# Altium PCB POEInjector.PcbDoc (part 2 of 2)
Units mil, origin at the board's own origin, x right, y up, seen from the top; angles counter-clockwise.
Board outline 5250 x 1900 mil, 4 copper layers (Top Layer, GND Plane, 24V Plane, Bottom Layer), stack 30.634 mil thick; 65 components, 70 nets, 262 pads, 25 vias.
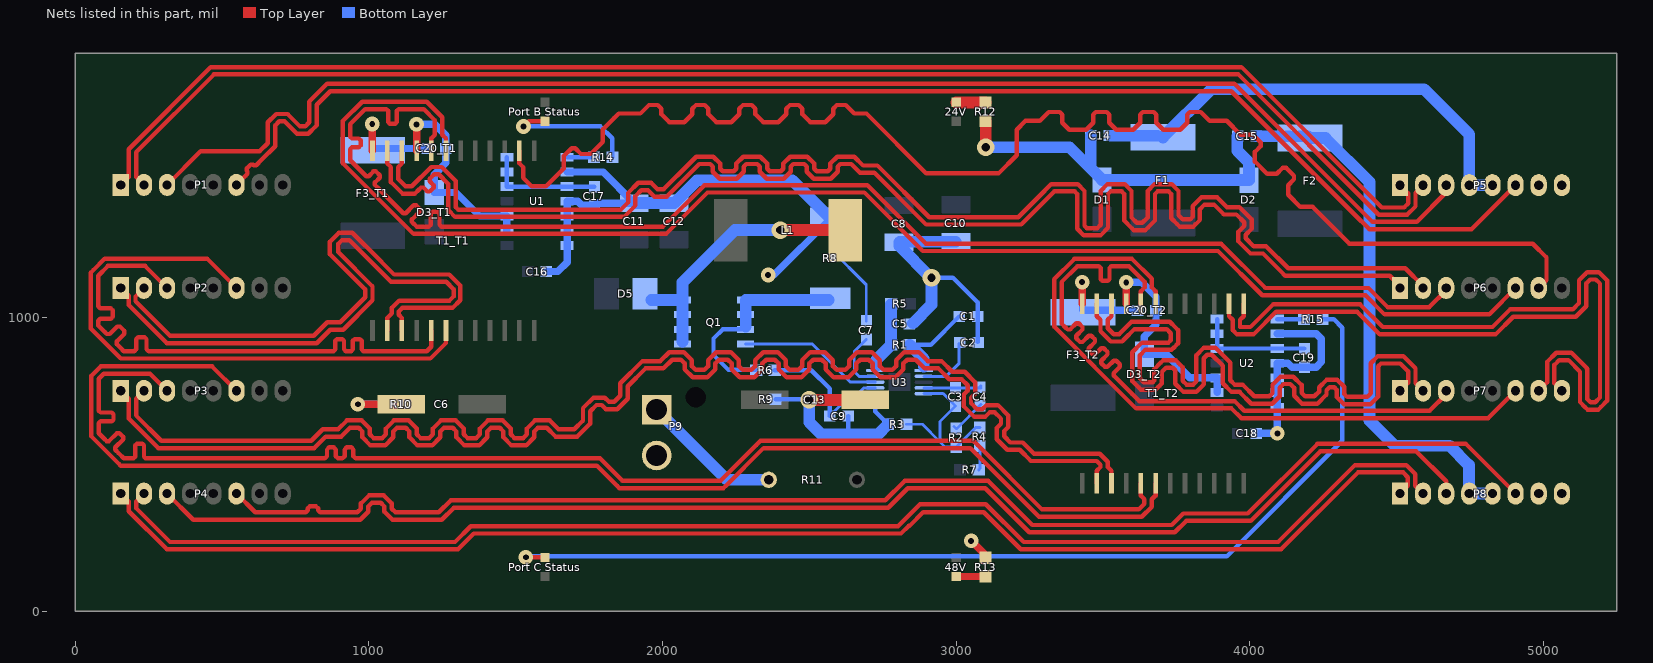
[diagram p4: the nets of this part, all layers, seen from the top]

## Via types
v1: diameter 50, hole 20, Top Layer to Bottom Layer, 14 vias
v2: diameter 60, hole 28, Top Layer to Bottom Layer, 7 vias
v3: diameter 200, hole 125, Top Layer to Bottom Layer, 4 vias

## Nets (pads, with @x,y where several pads share a name; then routed paths per layer and width w, separated by ;. In a path a pad name is that pad's centre, name@x,y a point inside that pad or via, vN(x,y) a via of type N, cw(c..) or ccw(c..) an arc to the next point about the centre after c; other vN are vias at no path point) (continued)
BR_OUT_T1_P: P6.7 T1_T1.14 | length 5009.2
  Top Layer w15: T1_T1.14@1513,1566.71 1513,1524.17 1525.5,1511.67 1525.5,1475.14 1547.32,1453.32 1554.64,1446 1603.36,1446 1610.68,1453.32 1664.22,1506.87 1664.22,1549.29 1690.84,1575.91 1703.11,1575.91 1722.91,1556.11 1755.9,1556.11 1797.16,1597.38 1797.16,1639.8 1834.68,1677.32 1851.36,1694 1925.18,1694 1954.18,1723 1983.82,1723 1996.5,1710.32 1996.5,1691.32 2023.82,1664 2074.18,1664 2101.5,1691.32 2101.5,1710.32 2114.18,1723 2143.82,1723 2156.5,1710.32 2156.5,1691.32 2183.82,1664 2234.18,1664 2261.5,1691.32 2261.5,1710.32 2274.18,1723 2303.82,1723 2316.5,1710.32 2316.5,1691.32 2343.82,1664 2394.18,1664 2421.5,1691.32 2421.5,1710.32 2434.18,1723 2463.82,1723 2476.5,1710.32 2476.5,1691.32 2503.82,1664 2554.18,1664 2581.5,1691.32 2581.5,1710.32 2594.18,1723 2623.82,1723 2652.82,1694 2694.64,1694 2898.64,1490 3144.36,1490 3206,1551.64 3206,1639 3236,1669 3285.18,1669 3315.18,1699 3352.82,1699 3361.5,1690.32 3361.5,1662.32 3384.82,1639 3443.18,1639 3466.5,1662.32 3466.5,1690.32 3475.18,1699 3512.82,1699 3521.5,1690.32 3521.5,1662.32 3544.82,1639 3603.18,1639 3626.5,1662.32 3626.5,1690.32 3635.18,1699 3672.82,1699 3681.5,1690.32 3681.5,1662.32 3704.82,1639 3763.18,1639 3786.5,1662.32 3786.5,1690.32 3795.18,1699 3832.82,1699 3862.82,1669 3921,1669 3968.05,1621.95 4010.47,1621.95 4037.09,1595.34 4037.09,1583.06 4017.29,1563.26 4017.29,1530.28 4058.56,1489.02 4091.54,1489.02 4111.34,1508.82 4123.61,1508.82 4150.23,1482.2 4150.23,1469.93 4130.43,1450.13 4130.43,1417.14 4171.69,1375.88 4214.12,1375.88 4339,1251 4963,1251 5010,1204 5010,1126.56 P6.7@4983.44,1100
BR_OUT_T2_N: P7.8 T1_T2.13 | length 2370.8
  Top Layer w15: T1_T2.13@3979,1046.71 3979,1004.17 3966.5,991.67 3966.5,967 4002,967 4079,1044 4375.36,1044 4452.36,967 4826,967 4886,1027 5099,1027 5120.5,1048.5 5120.5,1125.86 5141.32,1146.68 5148.64,1154 5188.36,1154 5195.68,1146.68 5217,1125.36 5217,716.64 5193.68,693.32 5186.36,686 5149.64,686 5142.32,693.32 5124,711.64 5124,815 5084.5,854.5 5053.5,854.5 5037,838 5037,775.18 P7.8@5062.18,750
BR_OUT_T2_P: P7.7 T1_T2.14 | length 2372.2
  Top Layer w15: T1_T2.14@3929,1046.71 3929,1004.17 3941.5,991.67 3941.5,956.64 3956.14,942 4012.36,942 4089.36,1019 4365,1019 4442,942 4836.36,942 4896.36,1002 5109.36,1002 5145.5,1038.14 5145.5,1115.5 5159,1129 5178,1129 5192,1115 5192,727 5176,711 5160,711 5149,722 5149,825.36 5140,834.36 5094.86,879.5 5043.14,879.5 5012,848.36 5012,778.56 P7.7@4983.44,750
G1_N: P1.6 P5.6 | length 4877.6
  Top Layer w15: P1.6@549.7,1451 580.85,1482.15 587.21,1488.51 587.21,1497 585.2,1499.02 585.2,1507.5 597.92,1520.23 606.41,1520.23 608.43,1518.21 616.91,1518.21 634.35,1535.65 681.48,1582.78 681.48,1605 681.48,1653.49 695.37,1667.38 713.3,1667.38 755.73,1624.96 794.37,1624.96 820.53,1651.12 822.9,1653.49 822.9,1724.2 868.7,1770 3937,1770 4354,1353 4407,1300 4754.7,1300 P5.6@4904.7,1450
G1_P: P1.3 P5.3 | length 4876.3
  Top Layer w15: P1.3@313.48,1451 428.48,1566 629.35,1566 656.48,1593.14 656.48,1611.06 656.48,1663.85 685.02,1692.38 723.66,1692.38 766.08,1649.96 784.01,1649.96 797.9,1663.85 797.9,1734.56 858.35,1795 3947.36,1795 4417.36,1325 4568,1325 4668.48,1425.48 P5.3@4668.48,1450
G2_N: P4.6 P8.6 | length 4765.3
  Top Layer w15: P4.6@549.7,400 613.7,336 775,336 785.5,336 792.5,343 792.5,349.36 799.5,356.36 820.5,356.36 827.5,349.36 827.5,343 834.5,336 853,336 960.82,336 973.5,348.68 973.5,366.46 1000.82,393.78 1051.18,393.78 1078.5,366.46 1078.5,348.68 1091.18,336 1238.64,336 1279.82,377.18 2758.82,377.18 2824.64,443 3109.36,443 3259.36,293 3734,293 3773,332 3993,332 4230,569 4735.7,569 P8.6@4904.7,400
G2_P: P4.3 P8.3 | length 4765.3
  Top Layer w15: P4.3@313.48,400 402.48,311 834.5,311 853,311 971.18,311 998.5,338.32 998.5,356.1 1011.18,368.78 1040.82,368.78 1053.5,356.1 1053.5,338.32 1080.82,311 1249,311 1290.18,352.18 2769.18,352.18 2835,418 3099,418 3249,268 3744.36,268 3783.36,307 4003.36,307 4240.36,544 4566,544 4668.48,441.52 P8.3@4668.48,400
G_IN_T1_N: P2.6 T1_T1.6 | length 2062.9
  Top Layer w15: P2.6@549.7,1100 449.7,1200 101.64,1200 61.32,1159.68 54,1152.36 54,962 156,860 1210,860 1262.75,912.75 1263,912.75 T1_T1.6@1263,955.29
G_IN_T1_P: P2.3 T1_T1.5 | length 2063.1
  Top Layer w15: P2.3@313.48,1100 238.48,1175 112,1175 79,1142 79,1048 79,1037.5 86,1030.5 122,1030.5 129,1023.5 129,1002.5 122,995.5 86,995.5 79,988.5 79,972.36 79.18,972.18 100.68,950.68 108.1,943.25 118,943.25 143.46,968.71 153.36,968.71 168.21,953.86 168.21,943.96 142.75,918.5 142.75,908.6 155.68,895.68 166.36,885 191,885 201.5,885 208.5,892 208.5,925.9 215.5,932.9 236.5,932.9 243.5,925.9 243.5,892 250.5,885 265,885 871,885 880,885 886,891 886,920.01 892,926.01 910,926.01 916,920.01 916,891 922,885 940,885 946,891 946,920.01 952,926.01 970,926.01 976,920.01 976,891 982,885 984,885 1198,885 1213,900 T1_T1.5@1213,955.29
G_IN_T2_N: P3.6 T1_T2.6 | length 4684.9
  Top Layer w15: P3.6@549.7,750 466.7,833 87.64,833 56,801.36 56,594.64 148.32,502.32 155.64,495 1777,495 1846,426 1853.32,418.68 2208.03,418.68 2215.36,426 2344.36,555 3048,555 3271,332 3282,321 3632.36,321 3666,354.64 3666,381 3677.75,392.75 3679,392.75 T1_T2.6@3679,435.29
G_IN_T2_P: P3.3 T1_T2.5 | length 4685.7
  Top Layer w15: P3.3@313.48,750 255.48,808 98,808 81,791 81,691 81,682 87,676 125,676 131,670 131,652 125,646 87,646 81,640 81,616 81,605 82.5,603.5 101,585 107.36,578.64 115.85,578.64 142.72,605.51 151.2,605.51 163.93,592.78 163.93,584.29 137.06,557.42 137.06,548.94 149.5,536.5 166,520 190,520 199,520 205,526 205,564 211,570 229,570 235,564 235,525 240,520 843,520 850.5,520 858,527.5 858,549.84 865.5,557.34 880.5,557.34 888,549.84 888,527.5 895.5,520 910.5,520 918,527.5 918,549.84 925.5,557.34 940.5,557.34 948,549.84 948,527.5 955.5,520 985,520 1787.36,520 1863.68,443.68 2197.68,443.68 2319,565 2334,580 3058.36,580 3073.36,565 3292.36,346 3622,346 3641,365 3641,381 3629.25,392.75 3629,392.75 T1_T2.5@3629,435.29
G_OUT_T1_N: P6.6 T1_T1.19 | length 5010.7
  Top Layer w15: T1_T1.19@1263,1566.71 1263,1609.25 1250.5,1621.75 1250.5,1680.86 1197.36,1734 977.64,1734 912,1668.36 912,1524.64 919.32,1517.32 1152.64,1284 2012.36,1284 2153.36,1425 2687.64,1425 2886.64,1226 3891.64,1226 4042.64,1075 4393.64,1075 4458.64,1010 4814.7,1010 P6.6@4904.7,1100
G_OUT_T1_P: P6.3 T1_T1.20 | length 5014.5
  Top Layer w15: T1_T1.20@1213,1566.71 1213,1609.25 1225.5,1621.75 1225.5,1670.5 1187,1709 1111,1709 1102,1709 1096,1703 1096,1665 1090,1659 1072,1659 1066,1665 1066,1703 1060,1709 1052,1709 988,1709 937,1658 937,1624 937,1615 943,1609 966.26,1609 972.26,1603 972.26,1585 966.26,1579 943,1579 937,1573 937,1562 937,1535 985,1487 991.36,1480.64 999.85,1480.64 1016.11,1496.9 1024.6,1496.9 1037.33,1484.17 1037.33,1475.69 1021.06,1459.42 1021.06,1450.94 1032.5,1439.5 1111,1361 1117.36,1354.64 1125.85,1354.64 1152.72,1381.51 1161.2,1381.51 1173.93,1368.78 1173.93,1360.29 1147.06,1333.42 1147.06,1324.94 1152,1320 1163,1309 1196,1309 1205,1309 1211,1315 1211,1353 1217,1359 1235,1359 1241,1353 1241,1315 1247,1309 1251,1309 2002,1309 2143,1450 2698,1450 2897,1251 3902,1251 4053,1100 4404,1100 4469,1035 4611,1035 4668.48,1092.48 P6.3@4668.48,1100
G_OUT_T2_N: P7.6 T1_T2.19 | length 2378.8
  Top Layer w15: T1_T2.19@3679,1046.71 3679,1089.25 3666.5,1101.75 3666.5,1131.36 3598.86,1199 3402.64,1199 3334,1130.36 3334,968.64 3612.64,690 3937.64,690 3970.64,657 4811.7,657 P7.6@4904.7,750
G_OUT_T2_P: P7.3 T1_T2.20 | length 2381.2
  Top Layer w15: T1_T2.20@3629,1046.71 3629,1089.25 3641.5,1101.75 3641.5,1121 3588.5,1174 3537,1174 3528,1174 3522,1168 3522,1130 3516,1124 3498,1124 3492,1130 3492,1168 3486,1174 3472,1174 3413,1174 3359,1120 3359,979 3373,965 3379.36,958.64 3387.85,958.64 3409.13,979.92 3417.62,979.92 3430.35,967.19 3430.35,958.71 3409.06,937.42 3409.06,928.94 3421.79,916.21 3430.28,916.21 3451.56,937.49 3460.05,937.49 3472.77,924.77 3472.77,916.28 3451.49,895 3451.49,886.51 3464.22,873.78 3472.7,873.78 3493.99,895.07 3502.47,895.07 3515.2,882.34 3515.2,873.86 3493.92,852.57 3493.92,844.08 3506.64,831.36 3515.13,831.36 3536.41,852.64 3544.9,852.64 3557.63,839.91 3557.63,831.43 3536.34,810.14 3536.34,801.66 3597.5,740.5 3623,715 3948,715 3981,682 4612,682 4668.48,738.48 P7.3@4668.48,750
GND: C1.2 C2.2 C5.2 C6.2 C7.2 C8.2 C9.2 C10.2 C11.2 C12.2 C13.2 C14.2 C15.2 C16.2 C17.2 C18.2 C19.2 D1.A D2.A P5.7 P5.8 P8.7 P8.8 P9.2 R3.2 R8.2 R9.2 R10.2 R12.2 R13.2 U1.2 U1.4 U1.5 U1.6 U1.7 U2.2 U2.4 U2.5 U2.6 U2.7 U3.6 | length 6314.2
  Top Layer w25: v1(963,704) C6.2@1111.2,704 ; v1@3052,239.5 R13.2@3101,190.5
  Top Layer w40: v2(2500,719) C13.2@2690.26,719 ; v2(3101,1579) R12.2@3101,1668.5
  Bottom Layer w10: R8.2@2572,1336.65 2572,1233 2694,1111 C7.2@2694,987.5
  Bottom Layer w15: R9.2@2385.5,721 v2@2498,721 ; 2632.5,603.5 C9.2@2632.5,664 ; 2724.65,731.35 2724.65,679.36 R3.2@2768.01,636 ; v2(2916,1135) 2989,1135 3073,1051 C1.2@3073,1003 C2.2@3073,916
  Bottom Layer w25: v1(963,704) R10.2@1079.71,704 ; C16.2@1604.5,1156 1644,1156 1675.5,1187.5 U1.7@1675.5,1245 U1.6@1675.5,1295 U1.5@1675.5,1345 U1.4@1675.5,1395 1712,1395 1725.5,1381.5 C17.2@1768,1381.5 C17.2@1775.48,1381.5 ; U1.2@1675.5,1495 1797.98,1495 C11.2@1904,1388.98 C17.2@1775.48,1388.98 ; v1(2360,1144) 2379.35,1144 R8.2@2572,1336.65 ; C18.2@4022.5,605 v1(4093.5,605) U2.7@4093.5,694 U2.6@4093.5,744 U2.5@4093.5,794 U2.4@4093.5,844 4130,844 4143.5,830.5 C19.2@4186,830.5 4225.5,830.5 4243,848 4243,927 4226,944 U2.2@4093.5,944
  Bottom Layer w40: C11.2@1904,1388.98 C12.2@2038,1388.98 ; C12.2@2040,1388.98 2118.02,1467 2441.65,1467 R8.2@2572,1336.65 ; v2(2500,719) 2500,643 2542,601 2733.01,601 R3.2@2768.01,636 ; C5.2@2853.27,979.73 2916,1042.46 v2(2916,1135) 2914,1135 2806,1243 C8.2@2806,1255.8 2808,1257.8 C10.2@2999,1257.8 ; v2(3101,1579) 3386,1579 D1.A@3497,1468 D2.A@3996,1468 ; 3458.5,1507.5 C14.2@3458.5,1619 ; C15.2@3957.5,1617 3957.5,1567.5 3997,1528 D2.A@3997,1467
  other v1: 3051,239
Net24V_C: 24V.C R12.1 | length 100
  Top Layer w40: 24V.C@3000,1731.5 R12.1@3100,1731.5
Net48V_C: 48V.C R13.1 | length 100
  Top Layer w25: 48V.C@3000,117.52 R13.1@3100,117.52
NetC1_1: C1.1 R1.2 U3.1 | length 296.7
  Bottom Layer w15: R1.2@2841.99,907 2914.01,907 C1.1@3010.01,1003
  Bottom Layer w40: R1.2@2841.99,907 2890,858.99 ; 2890,833 2890,854
NetC2_1: C2.1 U3.2 | length 205.7
  Bottom Layer w10: U3.2@2890,799.32 2966.31,799.32 3009,842 C2.1@3009,910.99
NetC3_1: C3.1 C4.1 U3.4 | length 203.5
  Bottom Layer w10: U3.4@2890,759.95 C4.1@3085,759.95 ; C4.1@3079,760.99 C4.1@3085,766.99
NetC3_2: C3.2 R2.2 R3.1 R4.1 U3.5 | length 579.1
  Bottom Layer w10: R3.1@2831,636 2885,636 2945,576 ; U3.5@2890,740.26 2955.74,740.26 C3.2@2998,698 2945,645 2945,576 ; R4.1@3081,625 3066.5,625 R2.2@3000,558.5 2962.5,558.5 2945,576
NetC4_2: C4.2 R2.1 | length 129.1
  Bottom Layer w10: R2.1@2993,628.5 R2.1@3000,621.5 3002.5,621.5 C4.2@3085,704
NetC5_1: C5.1 R1.1 R5.2 U3.10 | length 233.3
  Bottom Layer w40: 2728,833.22 2728,856 2748,876 R1.1@2779,907 2778.01,907.99 R5.2@2778.01,1045
NetC7_1: C7.1 U3.9 | length 204
  Bottom Layer w10: C7.1@2694,924.5 2653,883.5 2653,816 2669.68,799.32 U3.9@2724.65,799.32
NetC9_1: C9.1 R6.2 U3.7 | length 520
  Bottom Layer w10: C9.1@2569.5,664 2610.5,705 2663,705 2672,714 2672,746 2685.95,759.95 U3.7@2724.65,759.95
  Bottom Layer w15: R6.2@2382.5,820 2507,820 2569.5,757.5 C9.1@2569.5,664
NetC14_1: C14.1 F1.2 P5.4 P5.5 | length 1586.4
  Bottom Layer w40: C14.1@3526,1618 F1.2@3685.67,1618 ; F1.2@3704,1612.67 3868.33,1777 4593,1777 4747.22,1622.78 P5.4@4747.22,1450 P5.5@4825.96,1450
NetC15_1: C15.1 F2.2 P8.4 P8.5 | length 1829.4
  Bottom Layer w40: C15.1@4022.5,1617 F2.2@4197.67,1617 ; F2.2@4205,1610.67 4257.33,1610.67 4407,1461 4407,649 4493,563 4680,563 4746,497 4746,401.22 P8.4@4747.22,400 P8.5@4825.96,400
NetC17_1: C17.1 U1.3 U1.12 U1.13 U1.14 | length 397
  Bottom Layer w15: U1.14@1470.5,1545 U1.13@1470.5,1495 U1.12@1470.5,1445 U1.3@1675.5,1445 C17.1@1767.5,1445
NetC19_1: C19.1 U2.3 U2.12 U2.13 U2.14 | length 397
  Bottom Layer w15: U2.14@3888.5,994 U2.13@3888.5,944 U2.12@3888.5,894 U2.3@4093.5,894 C19.1@4185.5,894
NetC20_T1_1: C20_T1.1 F3_T1.1 T1_T1.24 | length 357.8
  Top Layer w25: T1_T1.24@1012,1567.71 v1(1012,1658)
  Bottom Layer w25: F3_T1.1@1013,1576 v1@1013,1658 ; F3_T1.1@1014,1575 C20_T1.1@1199.5,1575
NetC20_T2_1: C20_T2.1 F3_T2.1 T1_T2.24 | length 352.8
  Top Layer w25: T1_T2.24@3429,1046.71 v1(3429,1120)
  Bottom Layer w25: F3_T2.1@3430,1026 v1@3430,1120 ; F3_T2.1@3432,1024 C20_T2.1@3617.5,1024
NetD5_A: D5.A L1.1 Q1.5 Q1.6 Q1.7 Q1.8 | length 935.2
  Top Layer w40: v2(2401,1297) L1.1@2621.76,1297
  Bottom Layer w40: D5.A@1961.76,1059 Q1.8@2068.72,1059 ; Q1.5@2068.72,918 Q1.6@2068.72,959 Q1.7@2068.72,1009 Q1.8@2068.72,1059 ; v2(2401,1297) 2246,1297 2068.72,1119.72 Q1.8@2068.72,1059
NetP9_1: P9.1 R11.1 | length 480.7
  Bottom Layer w40: P9.1@1980.13,685.55 2218.68,447 R11.1@2362,447
"NetPort B Status_C": "Port B Status.C" R14.2 | length 464
  Top Layer w15: v1(1527,1650) 1544.52,1667.52 1600,1667.52
  Bottom Layer w15: v1(1527,1650) 1789,1650 1829.5,1609.5 R14.2@1829.5,1545
"NetPort C Status_C": "Port C Status.C" R15.2 | length 3472.2
  Top Layer w15: v1(1535,183) 1599.48,183
  Bottom Layer w15: v1@1535,186 3921,186 4315,580 4315,965 4286,994 R15.2@4247.5,994
NetQ1_1: Q1.1 Q1.2 Q1.3 R6.1 R8.1 | length 715.5
  Bottom Layer w15: Q1.3@2283.28,959 2205,959 2174,928 2174,872 2225,821 R6.1@2317.5,821
  Bottom Layer w40: Q1.3@2283.28,969 Q1.1@2283.28,1059 R8.1@2566,1059
NetQ1_4: Q1.4 U3.8 | length 494.9
  Bottom Layer w10: Q1.4@2283.28,909 2510,909 2639.37,779.63 2661.13,779.63 U3.8@2724.65,779.63
NetR4_2: R4.2 R7.1 | length 82.7
  Bottom Layer w10: R7.1@3077,481 3081,485 R4.2@3081,562.01
NetR14_1: R14.1 U1.1 | length 91
  Bottom Layer w15: U1.1@1675.5,1545 R14.1@1766.5,1545
NetR15_1: R15.1 U2.1 | length 91
  Bottom Layer w15: U2.1@4093.5,994 R15.1@4184.5,994
O1_N: P1.2 P5.2 | length 4880.9
  Top Layer w15: P1.2@234.74,1451 207.87,1477.87 207.87,1562 472.87,1827 3961,1827 4439,1349 4535.36,1349 4564,1377.64 4564,1424.26 P5.2@4589.74,1450
O1_P: P1.1 P5.1 | length 4881.8
  Top Layer w15: P1.1@156,1451 182.87,1477.87 182.87,1572.36 462.51,1852 3971.36,1852 4449.36,1374 4525,1374 4539,1388 4539,1422 P5.1@4511,1450
O2_N: P4.2 P8.2 | length 4769.1
  Top Layer w15: P4.2@234.74,400 207.87,373.13 207.87,350.49 323.36,235 1293.64,235 1347.64,289 2802,289 2877,364 3101,364 3230,235 4096,235 4358,497 4532.23,497 4562.87,466.36 4562.87,426.87 P8.2@4589.74,400
O2_P: P4.1 P8.1 | length 4766.6
  Top Layer w15: P4.1@156,400 182.87,373.13 182.87,340.13 313,210 1304,210 1358,264 2812.36,264 2838.36,290 2841.36,290 2887.36,336 3093.64,336 3219.64,210 4106.36,210 4368.36,472 4521.87,472 4537.87,456 4537.87,426.87 P8.1@4511,400
O_IN_T1_N: P2.2 T1_T1.3 | length 2057.5
  Top Layer w15: P2.2@234.74,1100 205.87,1071.13 205.87,1054.49 323.36,937 813,937 859,983 902.64,983 988,1068.36 988,1095 868,1215 868,1257.36 898.64,1288 944.36,1288 971.36,1261 976.36,1256 1004.36,1228 1086.36,1146 1274.36,1146 1312,1108.36 1312,1058.64 1285.36,1032 1114,1032 1102,1020 1102,1008.83 1113,997.83 T1_T1.3@1113,955.29
O_IN_T1_P: P2.1 T1_T1.2 | length 2056.2
  Top Layer w15: P2.1@156,1100 182.87,1073.13 182.87,1042.13 313,912 823.36,912 869.36,958 913,958 1013,1058 1013,1105.36 896,1222.36 896,1250 909,1263 934,1263 1076,1121 1264,1121 1289,1096 1289,1071 1275,1057 1103.64,1057 1079,1032.36 1079,1013.83 1063,997.83 T1_T1.2@1063,955.29
O_IN_T2_N: P3.2 T1_T2.3 | length 4675.7
  Top Layer w15: P3.2@234.74,750 207.87,723.13 207.87,666 293.87,580 804.64,580 843.64,619 895.82,619 925.82,649 976.18,649 1003.5,621.68 1003.5,601.68 1016.18,589 1045.82,589 1058.5,601.68 1058.5,621.68 1085.82,649 1136.18,649 1163.5,621.68 1163.5,601.68 1176.18,589 1205.82,589 1218.5,601.68 1218.5,621.68 1245.82,649 1296.18,649 1323.5,621.68 1323.5,601.68 1336.18,589 1365.82,589 1378.5,601.68 1378.5,621.68 1405.82,649 1456.18,649 1483.5,621.68 1483.5,601.68 1496.18,589 1525.82,589 1538.5,601.68 1538.5,621.68 1565.82,649 1616.18,649 1646.18,619 1700,619 1729.55,648.55 1729.55,690.98 1765.16,726.59 1803.8,726.59 1817.94,712.44 1835.87,712.44 1856.83,733.4 1856.83,775.83 1932,851 1992.82,851 2022.82,881 2073.18,881 2100.5,853.68 2100.5,833.68 2113.18,821 2142.82,821 2155.5,833.68 2155.5,853.68 2182.82,881 2233.18,881 2260.5,853.68 2260.5,833.68 2273.18,821 2302.82,821 2315.5,833.68 2315.5,853.68 2342.82,881 2393.18,881 2420.5,853.68 2420.5,833.68 2433.18,821 2462.82,821 2475.5,833.68 2475.5,853.68 2502.82,881 2553.18,881 2580.5,853.68 2580.5,833.68 2593.18,821 2622.82,821 2635.5,833.68 2635.5,853.68 2662.82,881 2713.18,881 2740.5,853.68 2740.5,833.68 2753.18,821 2782.82,821 2795.5,833.68 2795.5,853.68 2822.82,881 2873.18,881 2903.18,851 2950,851 2986.55,814.45 3028.98,814.45 3064.59,778.84 3064.59,740.2 3050.44,726.06 3050.44,708.13 3071.4,687.17 3089.33,687.17 3103.48,701.31 3142.12,701.31 3177.72,665.7 3177.72,627.06 3163.58,612.92 3163.58,594.99 3184.54,574.03 3226.97,574.03 3265,536 3488.86,536 3516.5,508.36 3516.5,490.33 3529,477.83 T1_T2.3@3529,435.29
O_IN_T2_P: P3.1 T1_T2.2 | length 4675.7
  Top Layer w15: P3.1@156,750 182.87,723.13 182.87,655.64 283.51,555 815,555 854,594 906.18,594 936.18,624 965.82,624 978.5,611.32 978.5,591.32 1005.82,564 1056.18,564 1083.5,591.32 1083.5,611.32 1096.18,624 1125.82,624 1138.5,611.32 1138.5,591.32 1165.82,564 1216.18,564 1243.5,591.32 1243.5,611.32 1256.18,624 1285.82,624 1298.5,611.32 1298.5,591.32 1325.82,564 1376.18,564 1403.5,591.32 1403.5,611.32 1416.18,624 1445.82,624 1458.5,611.32 1458.5,591.32 1485.82,564 1536.18,564 1563.5,591.32 1563.5,611.32 1576.18,624 1605.82,624 1635.82,594 1710.36,594 1754.55,638.2 1754.55,680.62 1775.51,701.59 1793.44,701.59 1807.59,687.44 1846.22,687.44 1881.83,723.05 1881.83,765.48 1942.36,826 2003.18,826 2033.18,856 2062.82,856 2075.5,843.32 2075.5,823.32 2102.82,796 2153.18,796 2180.5,823.32 2180.5,843.32 2193.18,856 2222.82,856 2235.5,843.32 2235.5,823.32 2262.82,796 2313.18,796 2340.5,823.32 2340.5,843.32 2353.18,856 2382.82,856 2395.5,843.32 2395.5,823.32 2422.82,796 2473.18,796 2500.5,823.32 2500.5,843.32 2513.18,856 2542.82,856 2555.5,843.32 2555.5,823.32 2582.82,796 2633.18,796 2660.5,823.32 2660.5,843.32 2673.18,856 2702.82,856 2715.5,843.32 2715.5,823.32 2742.82,796 2793.18,796 2820.5,823.32 2820.5,843.32 2833.18,856 2862.82,856 2892.82,826 2939.64,826 2976.2,789.45 3018.62,789.45 3039.59,768.49 3039.59,750.56 3025.44,736.41 3025.44,697.78 3061.05,662.17 3099.69,662.17 3113.83,676.31 3131.76,676.31 3152.72,655.35 3152.72,637.42 3138.58,623.28 3138.58,584.64 3174.19,549.03 3216.61,549.03 3254.64,511 3478.5,511 3491.5,498 3491.5,490.33 3479,477.83 T1_T2.2@3479,435.29
O_OUT_T1_N: P6.2 T1_T1.22 | length 4994.9
  Top Layer w15: T1_T1.22@1113,1566.71 1113,1524.17 1100.5,1511.67 1100.5,1471 1125.25,1446.25 1146.89,1446.25 1212.64,1512 1248.36,1512 1296,1464.36 1296,1375.36 1304.36,1367 1858.64,1367 1883,1391.36 1883,1423.36 1917.64,1458 1961.36,1458 1983.36,1436 2003.82,1436 2092.91,1525.09 2114.82,1547 2173.18,1547 2196.5,1523.68 2196.5,1505.68 2205.18,1497 2242.82,1497 2251.5,1505.68 2251.5,1523.68 2274.82,1547 2333.18,1547 2356.5,1523.68 2356.5,1505.68 2365.18,1497 2402.82,1497 2411.5,1505.68 2411.5,1523.68 2434.82,1547 2493.18,1547 2516.5,1523.68 2516.5,1505.68 2525.18,1497 2562.82,1497 2571.5,1505.68 2571.5,1523.68 2594.82,1547 2653.18,1547 2683.18,1517 2732,1517 2908,1341 3211.36,1341 3279.36,1409 3323.99,1453.64 3413.71,1453.64 3437.03,1430.32 3437.03,1312 3445.03,1304 3481,1304 3492.03,1315.03 3492.03,1430.32 3515.36,1453.64 3573.71,1453.64 3597.03,1430.32 3597.03,1339.97 3615,1322 3634.03,1322 3652.03,1340 3652.03,1430.32 3675.36,1453.64 3733.71,1453.64 3757.03,1430.32 3757.03,1347.97 3771,1334 3797,1334 3805,1342 3805,1378.64 3835.36,1409 3888.36,1409 3922.08,1375.28 3964.51,1375.28 4005.77,1334.01 4005.77,1301.03 3985.97,1281.23 3985.97,1268.96 4012.59,1242.34 4055.02,1242.34 4130.36,1167 4529.51,1167 4589.74,1106.77 P6.2@4589.74,1100
O_OUT_T1_P: P6.1 T1_T1.23 | length 4995.1
  Top Layer w15: T1_T1.23@1063,1566.71 1063,1524.17 1075.5,1511.67 1075.5,1460.64 1114.89,1421.25 1157.25,1421.25 1170,1434 1177.94,1441.94 1186.42,1441.94 1199.76,1428.6 1208.24,1428.6 1220.97,1441.33 1220.97,1449.82 1207.64,1463.15 1207.64,1471.64 1214,1478 1223,1487 1238,1487 1271,1454 1271,1365 1294,1342 1869,1342 1908,1381 1908,1413 1928,1433 1951,1433 1973,1411 2014.18,1411 2125.18,1522 2162.82,1522 2171.5,1513.32 2171.5,1495.32 2194.82,1472 2253.18,1472 2276.5,1495.32 2276.5,1513.32 2285.18,1522 2322.82,1522 2331.5,1513.32 2331.5,1495.32 2354.82,1472 2413.18,1472 2436.5,1495.32 2436.5,1513.32 2445.18,1522 2482.82,1522 2491.5,1513.32 2491.5,1495.32 2514.82,1472 2573.18,1472 2596.5,1495.32 2596.5,1513.32 2605.18,1522 2642.82,1522 2672.82,1492 2721.64,1492 2897.64,1316 3221.71,1316 3334.35,1428.64 3403.36,1428.64 3412.03,1419.96 3412.03,1301.64 3434.68,1279 3491.36,1279 3517.03,1304.68 3517.03,1419.96 3525.71,1428.64 3563.36,1428.64 3572.03,1419.96 3572.03,1329.61 3597.32,1304.32 3604.64,1297 3644.39,1297 3651.71,1304.32 3677.03,1329.64 3677.03,1419.96 3685.71,1428.64 3723.36,1428.64 3732.03,1419.96 3732.03,1337.61 3753.32,1316.32 3760.64,1309 3807.36,1309 3814.68,1316.32 3830,1331.64 3830,1368.29 3845.71,1384 3878,1384 3911.72,1350.28 3954.15,1350.28 3980.77,1323.66 3980.77,1311.39 3960.97,1291.59 3960.97,1258.6 4002.23,1217.34 4044.66,1217.34 4113,1149 4120,1142 4476,1142 4511,1107 P6.1@4511,1100
O_OUT_T2_N: P7.2 T1_T2.22 | length 2284.9
  Top Layer w15: T1_T2.22@3529,1046.71 3529,1004.17 3516.5,991.67 3516.5,963 3536.75,942.75 3554.75,942.75 3597,985 3727.36,985 3748.68,963.68 3756,956.36 3756,911.64 3748.68,904.32 3740.68,896.32 3733.36,889 3643.36,889 3624.75,870.39 3624.75,793.25 3639,779 3669,779 3675,785 3675,824 3697,846 3704.32,853.32 3748.03,853.32 3755.36,846 3763.68,837.68 3771,830.36 3771,784.36 3784.36,771 3807,771 3818,782 3818,871.36 3843.64,897 3882,897 3933,846 3933,786 3948,771 3975.36,771 4015.36,731 4066,731 4077,742 4077,770.53 4104.47,798 4148,798 4176,770 4176,743 4188,731 4219.64,731 4236,747.36 4236,762 4261,787 4297.36,787 4321,763.36 4321,739 4331,729 4400,729 4412,741 4412,844 4436,868 4522.36,868 4564,826.36 4564,775.74 P7.2@4589.74,750
O_OUT_T2_P: P7.1 T1_T2.23 | length 2286.6
  Top Layer w15: T1_T2.23@3479,1046.71 3479,1004.17 3491.5,991.67 3491.5,952.64 3526.39,917.75 3565.11,917.75 3572.43,925.07 3607.36,960 3717,960 3731,946 3731,922 3723,914 3633,914 3599.75,880.75 3599.75,782.89 3621.32,761.32 3628.64,754 3679.36,754 3686.68,761.32 3692.68,767.32 3700,774.64 3700,813.64 3714.68,828.32 3737.68,828.32 3746,820 3746,774 3774,746 3817.36,746 3843,771.64 3843,861 3855,873 3870.64,873 3908,835.64 3908,775.64 3937.64,746 3965,746 4005,706 4076.36,706 4102,731.64 4102,760.18 4114.82,773 4137.64,773 4151,759.64 4151,732.64 4177.64,706 4230,706 4261,737 4261,751.64 4271.36,762 4287,762 4296,753 4296,728.64 4320.64,704 4410.36,704 4437,730.64 4437,833.64 4446.36,843 4512,843 4539,816 4539,778 P7.1@4511,750
OUTA: C20_T1.2 D3_T1.A T1_T1.21 U1.9 U1.10 | length 746.8
  Top Layer w25: T1_T1.21@1163,1566.71 v1(1163,1657)
  Bottom Layer w25: v1(1163,1657) 1225,1657 1262.5,1619.5 C20_T1.2@1262.5,1575 1262.5,1525.5 1223,1486 D3_T1.A@1223,1425 1297,1425 1377,1345 U1.10@1470.5,1345 U1.9@1470.5,1295
OUTA_T2: C20_T2.2 D3_T2.A T1_T2.21 U2.9 U2.10 | length 737.4
  Top Layer w25: T1_T2.21@3579,1046.71 v1(3579,1119)
  Bottom Layer w25: v1(3579,1119) 3632,1119 3680.5,1070.5 C20_T2.2@3680.5,1024 3680.5,974.5 3641,935 D3_T2.A@3641,874 3715,874 3795,794 U2.10@3888.5,794 U2.9@3888.5,744
pads on no net: P1.4 P1.5 P1.7 P1.8 P4.4 P4.5 P4.7 P4.8 P9.0 T1_T1.1 T1_T1.4 T1_T1.7 T1_T1.10 T1_T1.15 T1_T1.18 T1_T2.1 T1_T2.4 T1_T2.7 T1_T2.10 T1_T2.15 T1_T2.18 U1.8 U2.8 U3.3 U3.11
copper on no net:
  other v3: 150,150 5100,150 150,1750 5100,1750

## Polygon pours and split planes (outlines as drawn)
GND on GND Plane (split plane): 5229.9,20.1 20.1,20.1 20.1,1879.9 5229.9,1879.9
24V on 24V Plane (split plane): 5229.9,20.1 20.1,20.1 20.1,1879.9 5229.9,1879.9

## Keep-outs
Keep-Out Layer:
  the board outline again, w10

## Silkscreen, mask and mechanical layers (free items; w line width, h text height)
Top Overlay:
  text "10/100BASE-T A IN" at 306,1583 h30
  text "10/100BASE-T A OUT" at 4434.17,1582 h30
  text "POE Injector / R2 - 2017" at 3367,1318 h60
  text "1000BASE-T B IN" at 356,1232 h30
  text "1000BASE-T B OUT" at 4434.17,1232 h30
  text "24V IN" at 1738,889 h60
  text "1000BASE-T C IN" at 356,882 h30
  text "1000BASE-T C OUT" at 4434.17,882 h30
  text "+" at 1600,628 h120
  text "10/100BASE-T D IN" at 306,532 h30
  text "10/100BASE-T D OUT" at 4434.17,532 h30
  text "-" at 1600,465 h120
Bottom Overlay:
  text "Designed By:" at 2854,300 h60
  text "David Zobel    Brit Chesley" at 3256,150 h60

## Dimensions
0,0 to 0,1900 on Mechanical 15
0,0 to 150,1750 on Mechanical 15
0,0 to 150,150 on Mechanical 15
0,0 to 5250,0 on Mechanical 15
5100,150 to 0,0 on Mechanical 15
0,0 to 150,150 on Mechanical 15